# Altium PCB PCB1.PcbDoc
Units mil, origin at the board's own origin, x right, y up, seen from the top; angles counter-clockwise.
Board outline 6000 x 4000 mil, 2 copper layers (Top Layer, Bottom Layer); 17 components, 7 nets, 37 pads, 0 vias.
Unrouted connection lines stored in the file: 16.
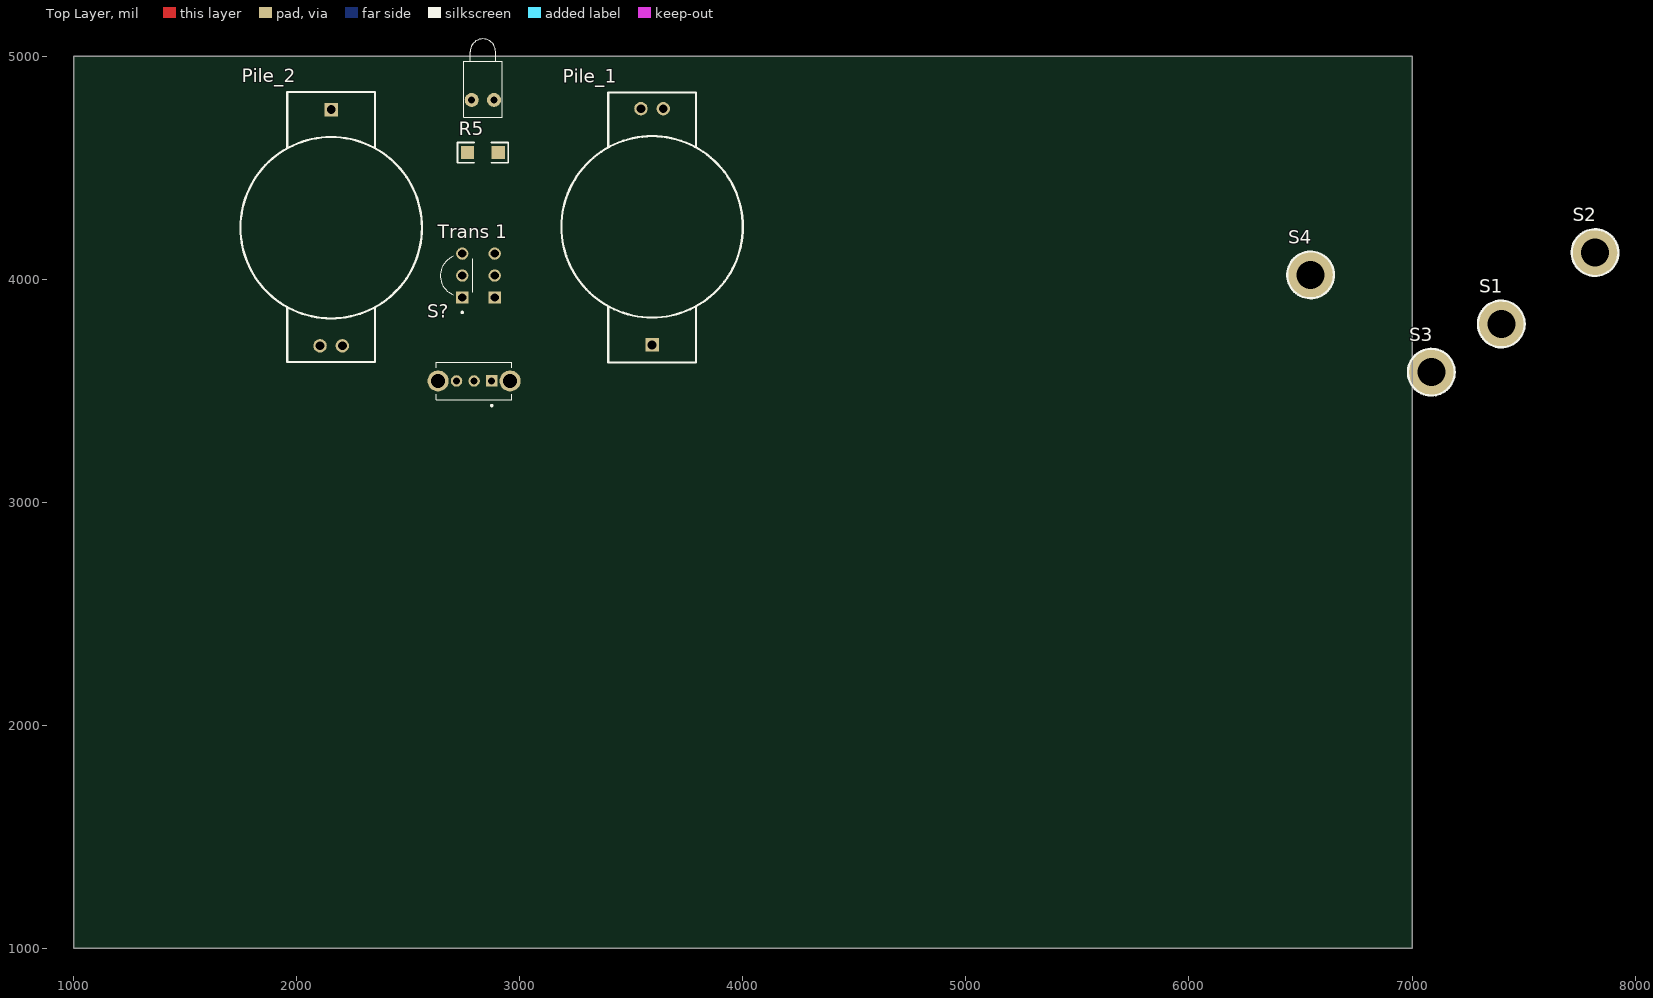
[diagram p0: Top Layer view]
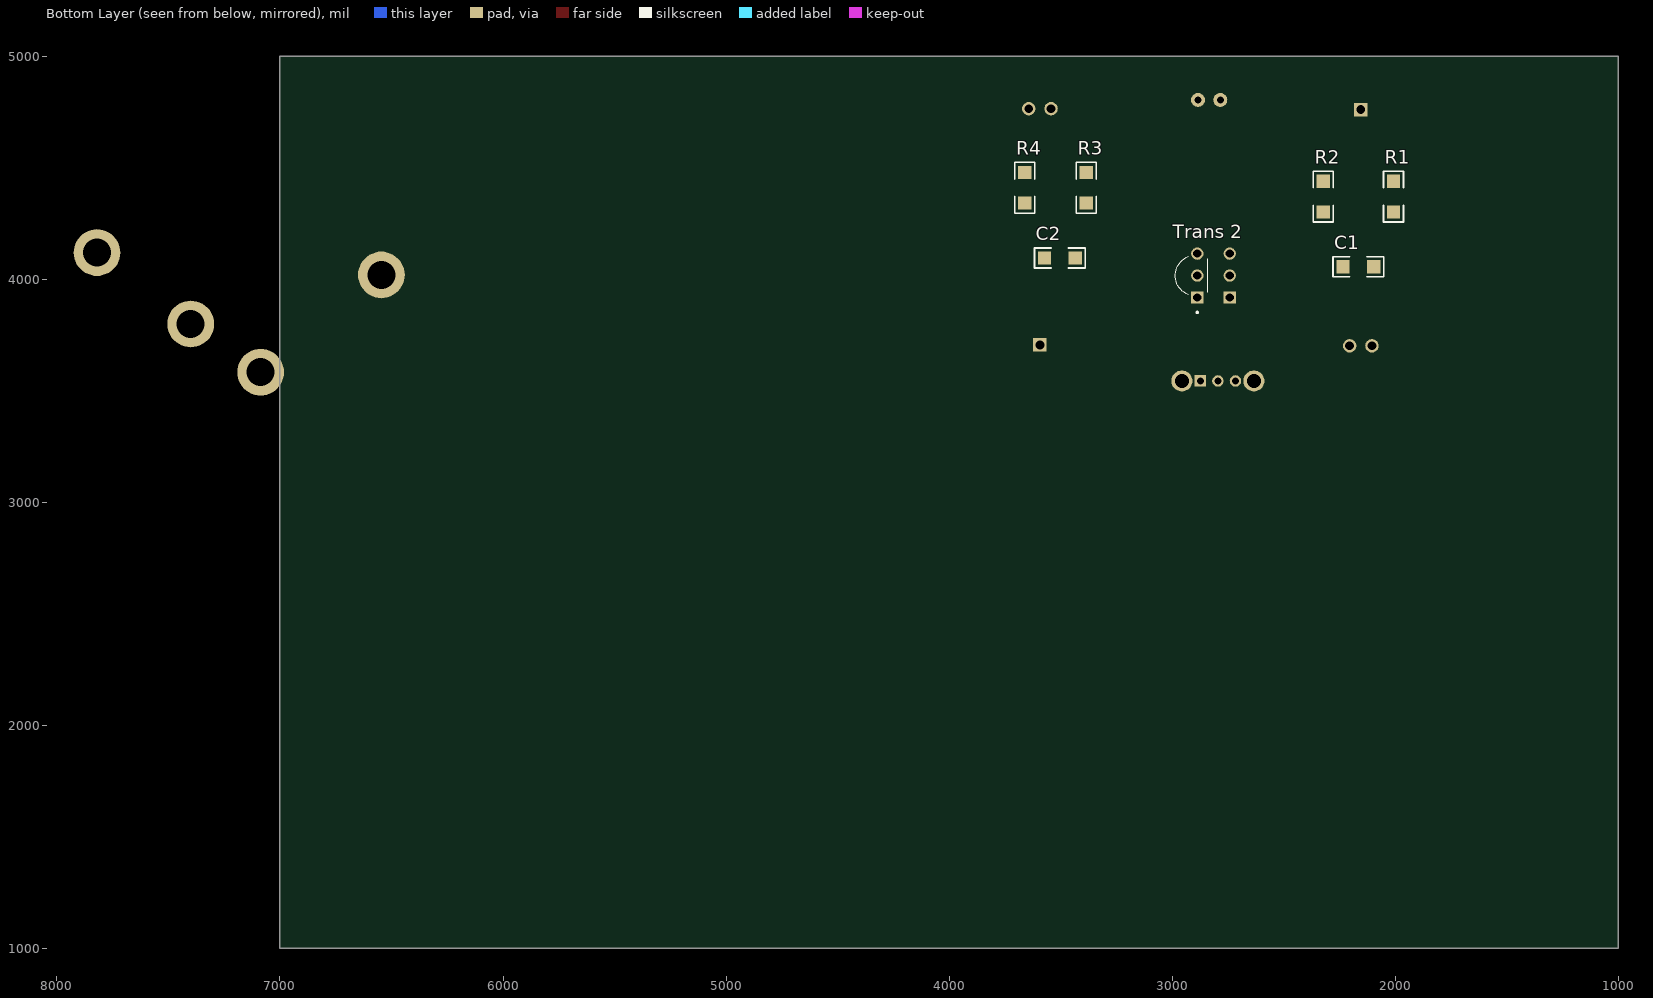
[diagram p1: Bottom Layer view, seen from below]

## Layer stack, top to bottom
Top Solder: solder mask 0.4, Solder Resist, Dk 3.5
Top Layer: signal copper 1.4
Dielectric 1: dielectric 12.6, FR-4, Dk 4.8
Bottom Layer: signal copper 1.4
Bottom Solder: solder mask 0.4, Solder Resist, Dk 3.5

## Board outline
1000,1000 7000,1000 7000,5000 1000,5000

## Design rules (kind name [scope] priority, off if disabled: settings)
Clearance [All] p1: gap=10
PolygonConnect [All] p1: connectstyle=Relief reliefconductorwidth=10 reliefentries=4 polygonreliefangle="90 Angle" airgapwidth=10
RoutingVias [All] p1: holewidth=28 width=50 viastyle="Through Hole" minholewidth=28 minwidth=50 maxholewidth=28 maxwidth=50
SolderMaskExpansion [All] p1: expansion=4
Width [All] p1: maxlimit=10 minlimit=10 preferedwidth=10
30 further rules are at their usual default settings.

## Components (designator, comment, footprint, x,y, rotation, side; value= is the part's Value field where it differs from the comment)
C1 "" "Capacitor 1206" 2165.35,4055.12 r180 bottom
C2 "" "Capacitor 1206" 3503.94,4094.49 r180 bottom
Pile_1 "" PCBComponent_1 3543.31,4763.78 r270 top
Pile_2 "Pile_2" PCBComponent_1 2204.72,3700.79 r90 top
R1 "" "Resistor 1206" 2007.87,4370.08 r90 bottom
R2 "" "Resistor 1206" 2322.83,4370.08 r90 bottom
R3 "" "Resistor 1206" 3385.83,4409.45 r90 bottom
R4 "" "Resistor 1206" 3661.42,4409.45 r90 bottom
R5 "" "Resistor 1206" 2834.65,4566.93 r180 top
S1 "Screw M3" "Screw M3" 7400.28,3798.74 r0 top
S2 "Screw M3" "Screw M3" 7820.28,4118.74 r0 top
S3 "Screw M3" "Screw M3" 7086.61,3582.68 r0 top
S4 "Screw M3" "Screw M3" 6545.28,4018.74 r0 top
S? "EG1247" SW_EG1247 2795.28,3543.31 r180 top
"Trans 1" "" TO92250P510H770-3 2716.54,4015.75 r90 top
"Trans 2" "2N3904" TO92250P510H770-3 2913.39,4015.75 r90 bottom
? "LED1" LED-1 2834.65,4803.15 r90 top

## Footprints (in the part's own frame and the unit in brackets; to place one, negate y for a bottom-side part, rotate by r counter-clockwise, add the part's x,y. Pads: shape width x height; smd on the part's side, far side on the other; paste and mask are expansions set on the pad)
"Capacitor 1206" [mm]
  rect 1.5x1.5 smd: 1(-1.75,0) 2(1.75,0)
  silkscreen extent -2.89,-1.14 2.89,1.14, body extent -1.98,-0.99 1.98,0.96, height 1.3
LED-1 [mm] "LED; 2 Leads"
  round 1.6 hole 0.8: 1(0,1.27) 2(0,-1.27)
  silkscreen extent -2,-2.2 6.95,2.2
PCBComponent_1 [mm]
  round 1.528 hole 1: "1 +"(0,0) "2 + "(0,2.54)
  rect 1.528x1.528 hole 1: "3 -"(26.9,1.27)
  silkscreen extent -1.83,-9.06 28.9,11.6
"Resistor 1206" [mm]
  rect 1.5x1.5 smd: 1(-1.75,0) 2(1.75,0)
  silkscreen extent -2.89,-1.14 2.89,1.14, body extent -1.98,-0.95 1.98,0.93, height 0.55
"Screw M3" [mm] "M3 iso Screw"
  round 5.32 hole 3.2 unplated: 0(0,0)
  silkscreen extent -2.66,-2.66 2.66,2.66
SW_EG1247 [mm]
  rect 1.308x1.308 / inner round 1.308 / far side rect 1.308x1.308 hole 0.8: 1(-2,0)
  round 1.308 hole 0.8: 2(0,0) 3(2,0)
  round 2.4 hole 1.6: SH1(-4.1,0) SH2(4.1,0)
  silkscreen extent -4.3,-2.15 4.3,2.9, body extent -4.3,-6.15 4.3,2.15, height 4.7
TO92250P510H770-3 [mm]
  rect 1.4x1.4 hole 0.93: 1(-2.5,-0.655)
  round 1.4 hole 0.93: 2(0,-0.655) 3(2.5,-0.655)
  silkscreen extent -4.3,-1.85 2.18,1.85, body extent -2.4,-1.53 2.4,2.4, height 7.74

## Part data
C1 C2: library part Cap2, "Capacitor"
Pile_1 Pile_2: library part Component_1
R1 R2 R3 R4 R5: library part Res2, "Resistor"
S?: "Slide Switch SPDT Through Hole, Right Angle"
"Trans 1": library part 2N3904, "NPN General Purpose Amplifier"
"Trans 2": "NPN General Purpose Amplifier"
?: "Typical RED GaAs LED"

## Nets (pads, with @x,y where several pads share a name; then routed paths per layer and width w, separated by ;. In a path a pad name is that pad's centre, name@x,y a point inside that pad or via, vN(x,y) a via of type N, cw(c..) or ccw(c..) an arc to the next point about the centre after c; other vN are vias at no path point)
GND: "Trans 2.1" ?.2
Net_1: ?.1 R5.1
NetC1_1: "Trans 1.1" "Trans 2.2" C1.1 C1.2 R1.1 R2.1
NetC2_1: "Trans 2.3" C2.1 R4.1
NetC2_2: "Trans 1.2" C2.2 R3.1
NetR1_2: R1.2 R2.2 R3.2 R4.2 S?.3
NetR5_2: "Trans 1.3" R5.2
pads on no net: "Pile_1.1 +" "Pile_1.2 + " "Pile_1.3 -" "Pile_2.1 +" "Pile_2.2 + " "Pile_2.3 -" S1.0 S2.0 S3.0 S4.0 S?.1 S?.2 S?.SH1 S?.SH2